# EAGLE board schematic-top (EAGLE 9.4.2)

Size 88.9 x 88.9 mm. Coordinates in mm from the lower left corner, seen from the top.
Outline: 0,0 88.9,0 88.9,88.9 0,88.9 0,0
Copper layers (1*16): Top 0.035mm / dielectric 1.5mm / Bottom 0.035mm
Design rules "default": minimum track width 6mil, minimum drill 0.35mm, track to track 6mil, track to pad 6mil, pad to pad 6mil, via to via 6mil, smd to smd 6mil, copper to edge 40mil, drill to drill 6mil, minimum pad ring 10mil, minimum via ring 8mil, stop-mask expansion 4mil, vias tented up to drill 0mil, thermal gap 10mil
Holes 1 mm at 18.79,69.06 18.52,68.79 18.26,68.79 17.99,68.53 17.99,68.26 17.73,68 17.99,67.74 18.26,67.74 18.52,67.47 18.79,67.74 19.05,67.74 19.32,67.74 19.58,67.74 19.84,68 19.58,68.26 19.58,68.53 19.32,68.79 18.79,68.26 27.52,70.12 27.25,69.85 26.99,69.59 26.99,69.32 27.25,69.32 27.52,69.06 27.78,69.06 28.05,69.06 28.31,69.06 28.31,69.06 28.58,69.06 28.84,69.32 28.84,69.59 28.84,69.85 28.58,69.85 28.58,70.12 28.31,70.12 28.05,70.12 28.05,69.59 26.99,41.28 27.25,41.54 27.52,41.54 27.52,41.28 27.78,41.28 28.05,41.01 28.05,40.75 28.05,40.48 28.05,40.22 28.05,39.95 27.78,39.69 27.52,39.16 27.25,38.89 26.99,38.37 26.72,38.1 26.46,37.84 26.46,37.57 26.46,37.31 26.19,37.31 25.93,37.57 25.67,37.84 25.67,38.37 25.4,38.37 25.14,38.63 24.87,39.16 24.61,39.42 24.34,39.69 24.08,40.22 24.08,40.48 24.34,40.75 24.34,41.01 24.61,41.28 24.87,41.54 25.14,41.54 25.4,41.28 25.67,40.75 25.93,40.75 26.19,40.75 26.46,40.75 26.72,40.75 26.72,40.48 26.46,39.95 26.46,39.42 26.19,38.89 25.67,39.16 25.67,39.69 25.4,39.95 26.99,39.95 62.71,66.94 63.24,66.94 63.77,66.94 64.3,66.94 64.82,66.94 63.77,66.41 63.77,65.88 63.77,67.47 63.77,68 53.71,38.1 53.98,38.63 54.51,39.16 54.77,39.69 55.04,40.22 55.04,40.75 55.83,40.22 55.83,39.69 55.56,39.16 55.83,38.63 55.83,38.37 55.83,37.84 55.83,37.31 56.09,37.04 56.36,40.22 57.15,40.75 57.95,41.01 56.89,40.48 58.21,41.28 58.74,41.54 57.42,41.81 58.47,42.33 59.8,41.81 60.86,42.6 59.53,42.6 60.33,42.6 59.27,41.28

## Footprints (pad centres in the part's own frame; a part is rotated, then mirrored left to right if it is on the bottom)
3,0 = hole 3: 0,0

## Placement (x,y rotation side)
U$2  [3,0]  4.28,4.16 0 top
U$3  [3,0]  4.24,84.57 0 top
U$4  [3,0]  84.78,84.76 0 top

## Library data of the parts
U$2-U$4 = holes

## Text on the board
bPlace: Never trust a trash panda | OHV means not the vehicle you need to complete the journey | Bats need love too | Smoke follows beauty | Art credit: / 4x4: Luis Prado (thenounproject.com) / Bat: Kirill Kolchenko (thenounproject.com) / Raccoon: Michael G. Brown (thenounproject.com) / Mountain: Sigra (thenounproject.com)